# Altium PCB PCB1 Ian.PCB.1.PcbDoc
Units mil, origin at the board's own origin, x right, y up, seen from the top; angles counter-clockwise.
Board outline 6000 x 4000 mil, 2 copper layers (Top Layer, Bottom Layer); 11 components, 16 nets, 60 pads, 0 vias.
Unrouted connection lines stored in the file: 25.
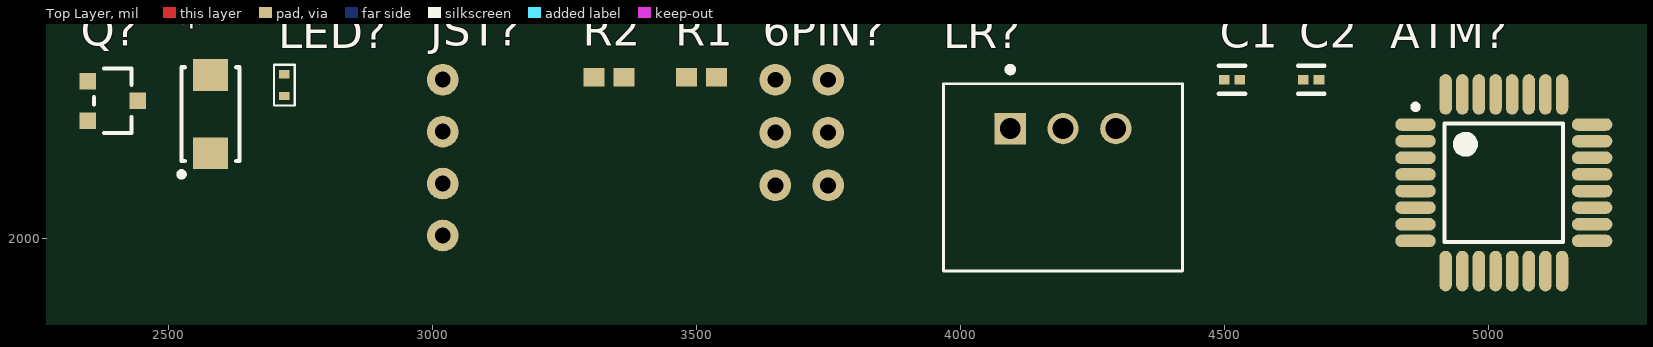
[diagram p0: Top Layer view]
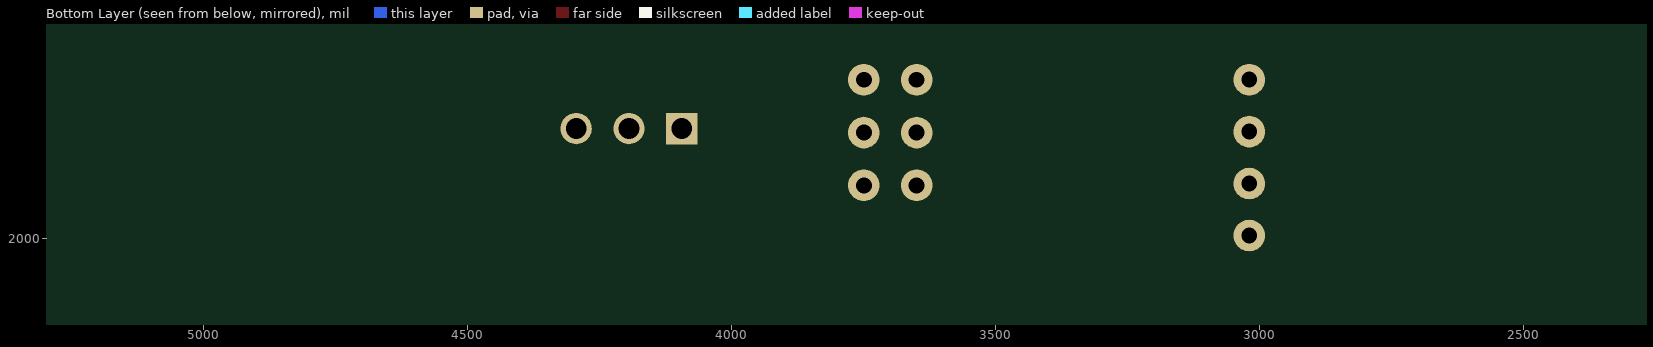
[diagram p1: Bottom Layer view, seen from below]

## Layer stack, top to bottom
Top Solder: solder mask 0.4, Solder Resist, Dk 3.5
Top Layer: signal copper 1.4
Dielectric 1: dielectric 12.6, FR-4, Dk 4.8
Bottom Layer: signal copper 1.4
Bottom Solder: solder mask 0.4, Solder Resist, Dk 3.5

## Board outline
1000,1000 7000,1000 7000,5000 1000,5000

## Design rules (kind name [scope] priority, off if disabled: settings)
Clearance [All] p1: gap=10 ignorepadtopadclearanceinfootprint=FALSE except(0: Arc-Hole Track-Hole SMDPad-Hole THPad-Hole Via-Hole Fill-Hole Poly-Hole Region-Hole Text-Hole)
PolygonConnect [All] p1: connectstyle=Relief reliefconductorwidth=10 reliefentries=4 polygonreliefangle="90 Angle" airgapwidth=10
RoomDefinition Sheet1 [InComponentClass('Sheet1')] p1: confinementstyle=ConfineIn formatcopy=TRUE lockcomponents=FALSE outline 2315,1870 5265,1870 5265,2440 2315,2440
RoutingVias [All] p1: holewidth=28 width=50 viastyle="Through Hole" minholewidth=28 minwidth=50 maxholewidth=28 maxwidth=50
SolderMaskExpansion [All] p1: expansion=4 istentingtop=FALSE
Width [All] p1: maxlimit=10 minlimit=10 preferedwidth=10
30 further rules are at their usual default settings.

## Components (designator, comment, footprint, x,y, rotation, side; value= is the part's Value field where it differs from the comment)
6PIN? "6 Pin Header" "6 PIN HEADER" 3650,2100 r90 top
* "flyback diode" "flyback diode - duplicate" 2580,2235 r90 top
ATM? "ATmega328P-AU" 32A_M 5030,2105 r0 top
C1 "100nF" FP-CL779-IPC_C 4515,2300 r0 top
C2 "100nF" FP-CL779-IPC_C 4665,2300 r0 top
JST? "JST" JST 3020,2005 r90 top
LED? "LED" LED 2720,2290 r90 top
LR? "VX78012-1000" VX78012-1000 4195,2115 r0 top
Q? "MOSFET" FP-SOT23-MFG 2395,2260 r0 top
R1 "10k" RESC1608X06N 3510,2305 r0 top
R2 "10k" RESC1608X06N 3335,2305 r0 top

## Footprints (in the part's own frame and the unit in brackets; to place one, negate y for a bottom-side part, rotate by r counter-clockwise, add the part's x,y. Pads: shape width x height; smd on the part's side, far side on the other; paste and mask are expansions set on the pad)
"6 PIN HEADER" [mil]
  round 60 hole 30: 1(0,0) 2(100,0) 3(200,0) 4(0,-100) 5(100,-100) 6(200,-100)
32A_M [mm] "Thin QFP, 32-Leads, Body 7x7mm, Pitch 0.8mm, IPC Low Density"
  oval 1.95x0.6 smd: 1(-4.25,2.8) 2(-4.25,2) 3(-4.25,1.2) 4(-4.25,0.4) 5(-4.25,-0.4) 6(-4.25,-1.2) 7(-4.25,-2) 8(-4.25,-2.8) 17(4.25,-2.8) 18(4.25,-2) 19(4.25,-1.2) 20(4.25,-0.4) 21(4.25,0.4) 22(4.25,1.2) 23(4.25,2) 24(4.25,2.8)
  oval 0.6x1.95 smd: 9(-2.8,-4.25) 10(-2,-4.25) 11(-1.2,-4.25) 12(-0.4,-4.25) 13(0.4,-4.25) 14(1.2,-4.25) 15(2,-4.25) 16(2.8,-4.25) 25(2.8,4.25) 26(2,4.25) 27(1.2,4.25) 28(0.4,4.25) 29(-0.4,4.25) 30(-1.2,4.25) 31(-2,4.25) 32(-2.8,4.25)
  silkscreen extent -4.37,-2.85 2.85,3.77, body extent -3.5,-3.5 3.5,3.5, height 1.2
"flyback diode - duplicate" [mm] "Molded Diode, 2-Leads, Body 4.25x2.67mm, IPC Medium Density"
  rect 1.52x1.68 smd: 1(-1.88,0) 2(1.88,0)
  silkscreen extent -3.02,-1.4 2.25,1.51, body extent -2.47,-1.4 2.47,1.4, height 2.29
FP-CL779-IPC_C [mil]
  rect 20.29x18.6 smd paste+0 mask+0: 1(-14.9,0) 2(14.9,0)
  silkscreen extent -25,-27 25,27, body extent -29,-15 29,15, height 10
FP-SOT23-MFG [mm]
  rect 0.8x0.8 smd paste+0 mask+0: 1(-1.2,0.95) 2(-1.2,-0.95) 3(1.2,0)
  silkscreen extent -0.9,-1.55 0.9,1.55, body extent -1.7,-1.78 1.7,1.78, height 0.25
JST [mil]
  round 60 hole 30: 1(0,0) 2(98.43,0) 3(196.85,0) 4(295.28,0)
LED [mm]
  rect 0.4x0.5 smd: A(-0.525,0) K(0.525,0)
  silkscreen extent -0.97,-0.5 0.97,0.5
RESC1608X06N [mm] "Chip Resistor, 2-Leads, Body 1.60x0.80mm, IPC Medium Density"
  rect 1x0.9 smd: 1(-0.725,0) 2(0.725,0)
  body extent -0.87,-0.45 0.87,0.45, height 0.55
VX78012-1000 [mm]
  rect 1.508x1.508 hole 1: 1(-2.54,2.35)
  round 1.508 hole 1: 2(0,2.35) 3(2.54,2.35)
  silkscreen extent -5.75,-4.5 5.75,5.29

## Part data
*: Supplier Part Number 1=SS14-E3/61TGICT-ND, Supplier 1=Digi-Key
ATM?: library part CMP-0095-00269-2, "8-bit AVR Microcontroller, 32KB Flash, 1KB EEPROM, 2KB SRAM, 32-pin TQFP, Industrial Grade (-40°C to 85°C)", Code_JEDEC=MS-026-ABA, ComponentLink1Description="Manufacturer URL", ComponentLink1URL=http://www.atmel.com/, ComponentLink2Description="ATmega48A/48PA/88A/88PA/168A/168PA/328/328P Datasheet", ComponentLink2URL=http://www.atmel.com/dyn/resources/prod_documents/doc8271.pdf, ComponentLink3Description="ATmega48A/48PA/88A/88PA/168A/168PA/328/328P Summary", ComponentLink3URL=http://www.atmel.com/dyn/resources/prod_documents/8271S.pdf, DatasheetVersion="revD, May-2011", PackageDescription="32-Lead, 7x7x1.0 mm Body, 0.8mm Lead Pitch, Thin Profile Plastic Quad Flat Package (TQFP)", PackageReference=32A, PackageVersion="revC, Oct-2010", RevisionNote="DatasheetVersion & PackageVersion updated. URLs added."
C1 C2: library part CMP-13271-002336-1, "Cap Ceramic 100nF 50V X7R ±10% SMD 0402 +125°C Paper T/R"
JST?: Supplier Part Number 1=8201434, Supplier 1=RSComponents
LED?: Supplier Part Number 1=BL-HKC37A-AV-TRBCT-ND, Supplier 1=Digi-Key
LR?: Package=None, Supplier Part Number 1=LM2575D2T-12R4GOSCT-ND, Availability=Unavailable, MF="{'manufacturer': u'CUI'}", MP=VX78012-1000, Price=None, Supplier 1=Digi-Key
Q?: library part CMP-83955-000006-1, "MOSFET N-CH 30V 5.7A SOT23, part number: AO3400A", Case/Package=SOT-23, Continuous Drain Current (ID)=5.7A, Drain to Source Voltage (Vdss)=30V, Gate to Source Voltage (Vgs)=12V, Input Capacitance=630pF, Max Operating Temperature=150°C, Max Power Dissipation=1.4W, Min Operating Temperature=-55°C, Lead Free="Lead Free", Mount="Surface Mount", Number of Elements=1, Number of Pins=3, Packaging="Tape and Reel", Power Dissipation=1.4W, Radiation Hardening=No, Rds On Max=26.5mR
R1 R2: library part "10k resistor", Supplier Part Number 1=311-10KLECT-ND, Supplier 1=Digi-Key

## Nets (pads, with @x,y where several pads share a name; then routed paths per layer and width w, separated by ;. In a path a pad name is that pad's centre, name@x,y a point inside that pad or via, vN(x,y) a via of type N, cw(c..) or ccw(c..) an arc to the next point about the centre after c; other vN are vias at no path point)
+5: 6PIN?.6 ATM?.4 ATM?.6 ATM?.18 ATM?.20 C1.2 C2.2 JST?.4 Q?.2 R1.2
+12: LR?.3
+24: LR?.1
GND: 6PIN?.4 ATM?.3 ATM?.5 ATM?.21 C1.1 C2.1 JST?.1 LR?.2 Q?.3
LED: ATM?.32 R2.2
MISO: 6PIN?.1 ATM?.16
MOSI: 6PIN?.5 ATM?.15
NetLED?_2: R2.1
RESET: 6PIN?.3 ATM?.29 R1.1
SCK: 6PIN?.2 ATM?.17
SCL: ATM?.28 JST?.3
SDA: ATM?.27 JST?.2
SDI: ATM?.31
SDO: ATM?.30
"XTAL 1": ATM?.7
"XTAL 2": ATM?.8
pads on no net: *.1 *.2 ATM?.1 ATM?.2 ATM?.9 ATM?.10 ATM?.11 ATM?.12 ATM?.13 ATM?.14 ATM?.19 ATM?.22 ATM?.23 ATM?.24 ATM?.25 ATM?.26 LED?.A LED?.K Q?.1